# Altium PCB smartpot第三版.PcbDoc
Units mil, origin at the board's own origin, x right, y up, seen from the top; angles counter-clockwise.
Board outline 3827.48 x 2540.24 mil, 2 copper layers (Top Layer, Bottom Layer); 84 components, 74 nets, 277 pads, 61 vias.
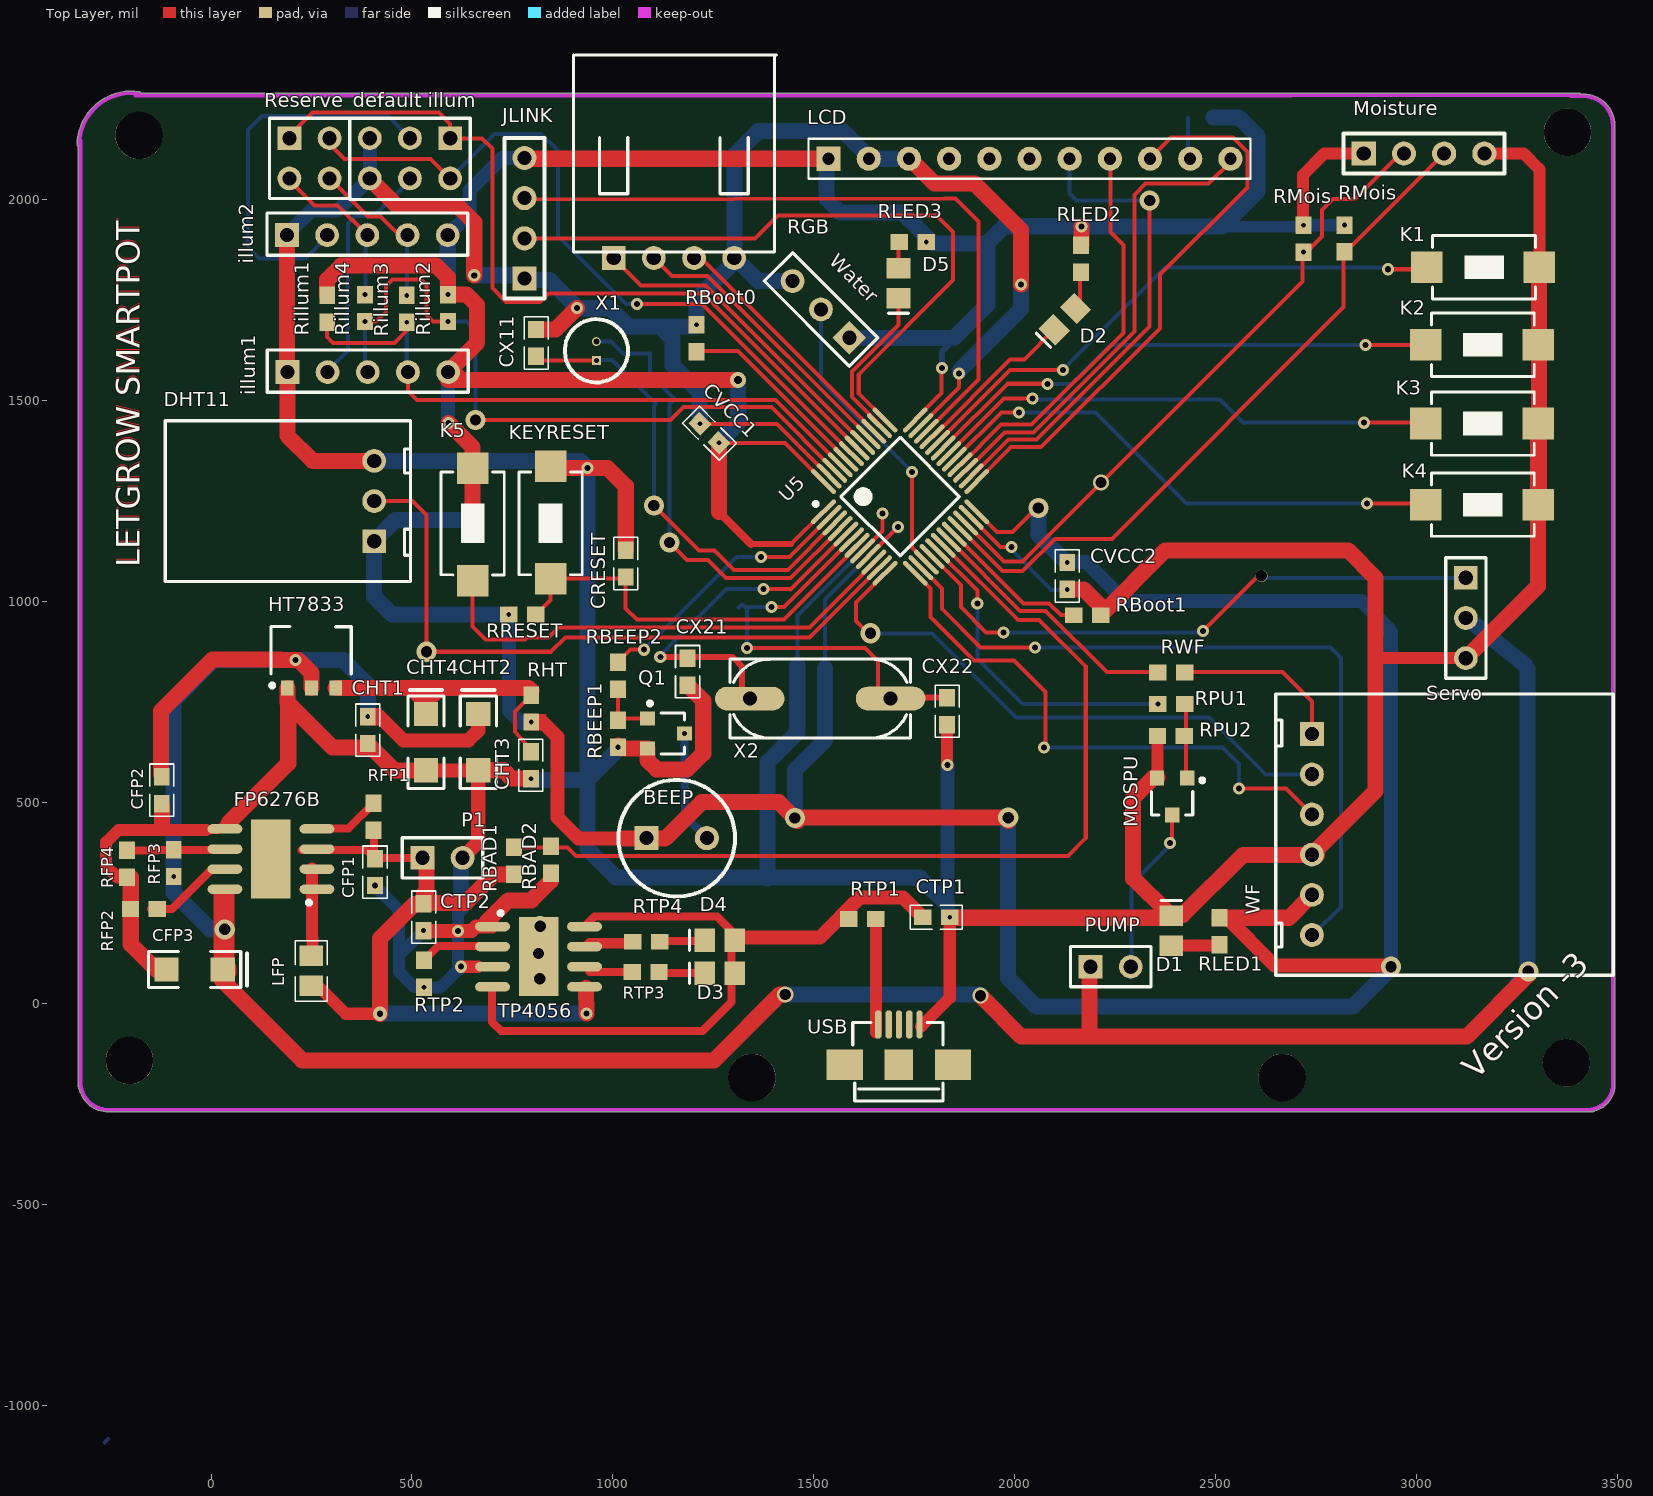
[diagram p0: Top Layer view]
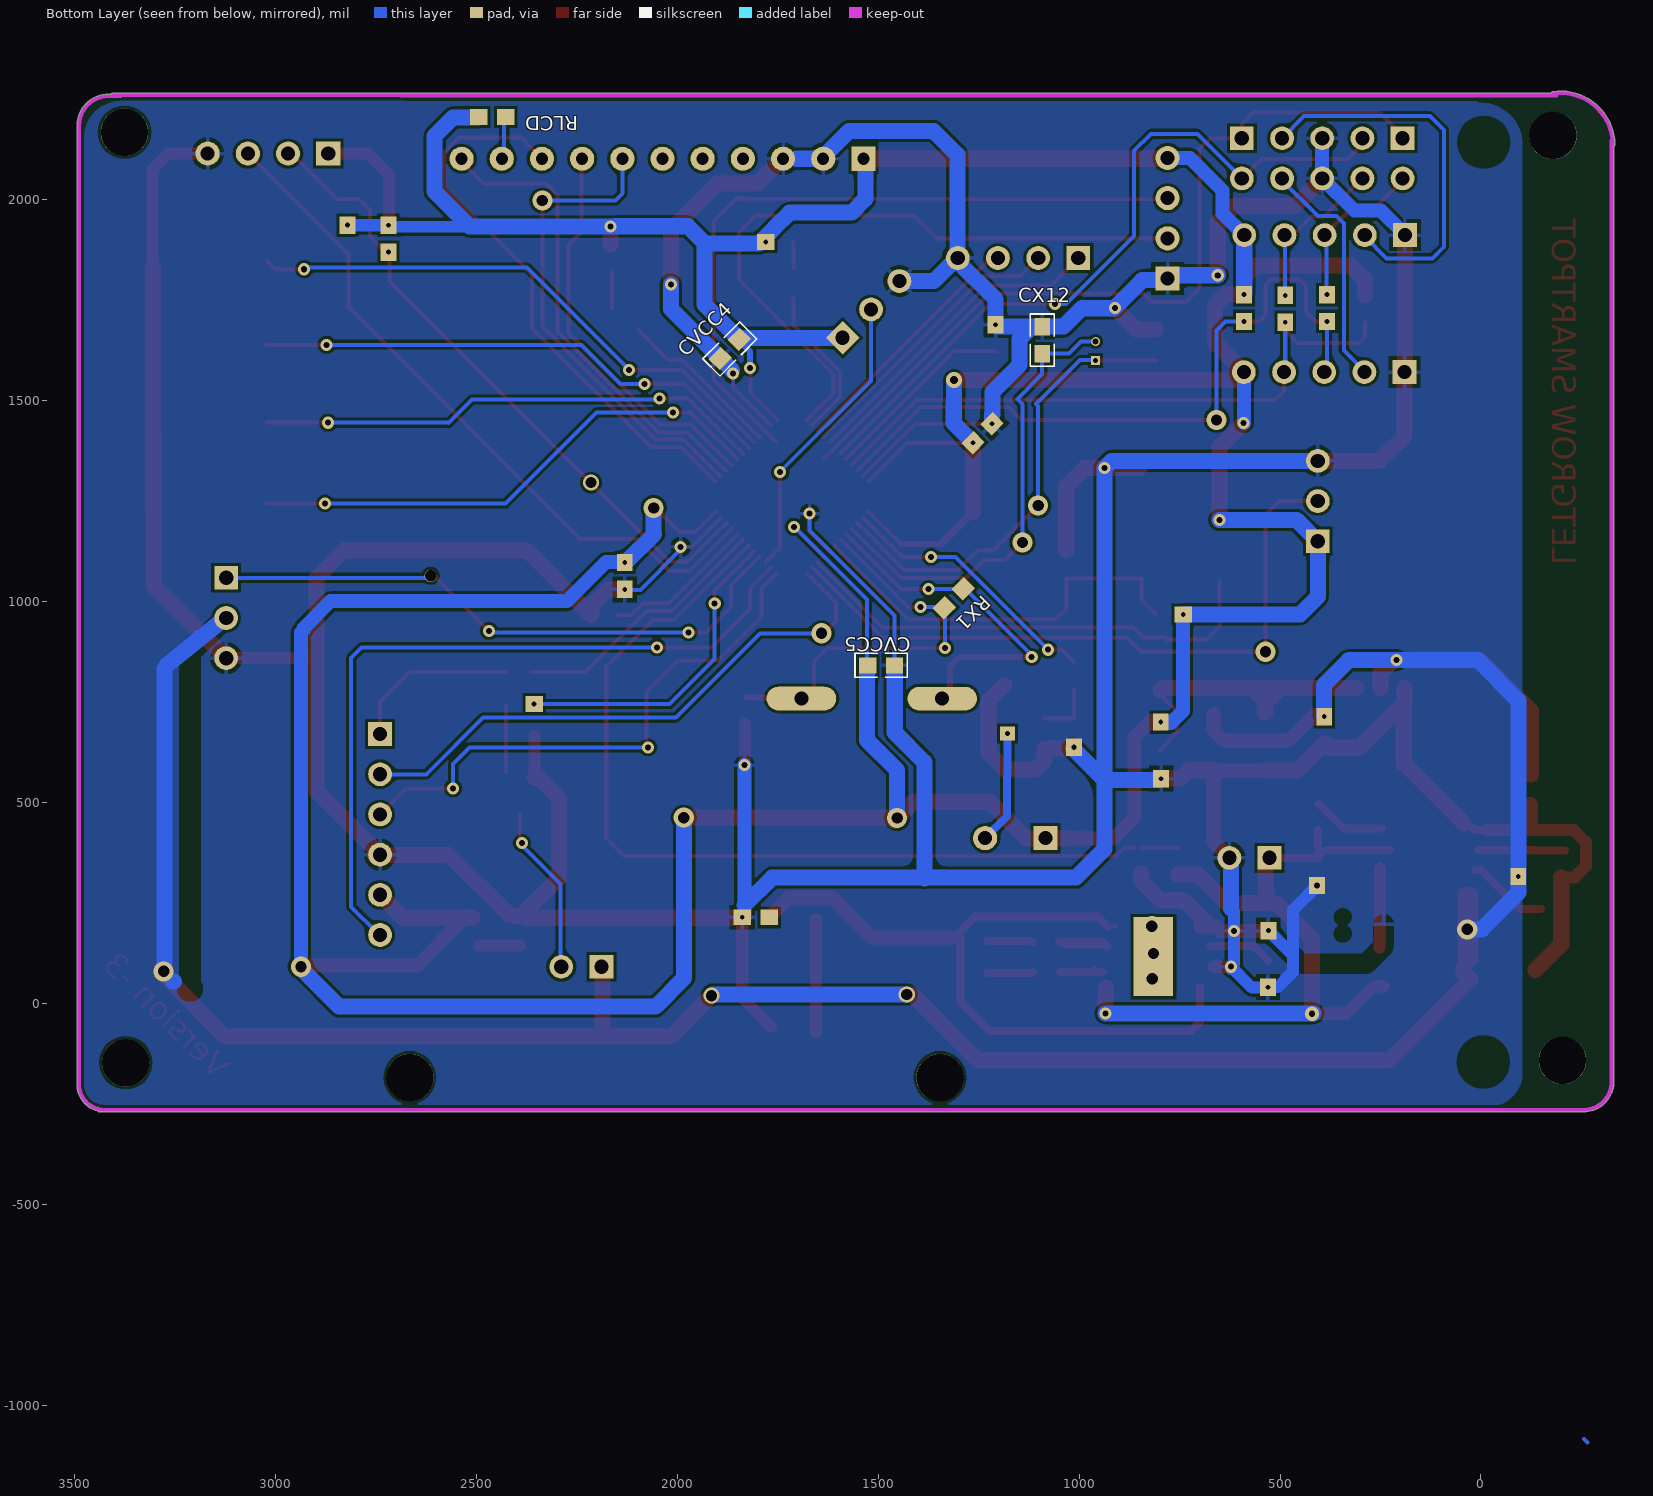
[diagram p1: Bottom Layer view, seen from below]

## Layer stack, top to bottom
Top Solder: solder mask 0.4, Solder Resist, Dk 3.5
Top Layer: signal copper 1.4
Dielectric 1: dielectric 12.6, FR-4, Dk 4.8
Bottom Layer: signal copper 1.4
Bottom Solder: solder mask 0.4, Solder Resist, Dk 3.5

## Board outline
-330.63,-191.74 -330.63,2133.71 cw(c-328.45,2138.23) -333.47,2138.33 cw(c-198.6,2135.46) -179.28,2268.96 cw(c-180,2264) -175.09,2265.01 2682.56,2265.01 cw(c2684.61,2260.44) 2684.61,2265.45 3404.61,2265.45 cw(c3404.61,2260.44) 3408.89,2263.04 3417.69,2262.83 cw(c3417.57,2257.82) 3417.69,2262.83 cw(c3415.82,2184.65) 3494.01,2185.79 cw(c3489,2185.72) 3494.02,2185.72 cw(c3489,2185.72) 3493.99,2185.18 cw(c3489,2184.65) 3494.02,2184.65 3494.02,-206 cw(c3489,-206) 3494,-206.34 cw(c3425.79,-201.65) 3443.17,-267.78 cw(c3439,-265) 3439,-270.01 -261,-270.01 cw(c-261,-265) -261.43,-270 cw(c-254.96,-194.55)

## Design rules (kind name [scope] priority, off if disabled: settings)
Clearance Clearance_1 [All] p1: gap=7
PolygonConnect [All] p1: connectstyle=Relief reliefconductorwidth=10 reliefentries=4 polygonreliefangle="90 Angle" airgapwidth=10
RoutingVias [All] p1: holewidth=15 width=30 viastyle="Through Hole" minholewidth=10 minwidth=20 maxholewidth=50 maxwidth=70
SolderMaskExpansion [All] p1: expansion=4
UnConnectedPin [All] p1:
UnpouredPolygon [All] p1: allowunpoured=TRUE
Width [All] p1: maxlimit=50 minlimit=10 preferedwidth=10
29 further rules are at their usual default settings.

## Components (designator, comment, footprint, x,y, rotation, side; value= is the part's Value field where it differs from the comment)
BEEP "BEEP" BEEP 1159,411 r0 top
CFP1 "22uF" 0603-1#1 408,326.54 r90 top
CFP2 "22uF" 0603-1#2 -123,530.54 r90 top
CFP3 "100uF" "1206 - J" -41,84 r180 top
CHT1 "0.1uf" 0603-1#3 390,680 r90 top
CHT2 "10uf /25V" "1206 - J" 665,650 r270 top
CHT3 "CAP" 0603-1#4 796,592.53 r90 top
CHT4 "CAP Pol" "1206 - J" 535,650 r270 top
CRESET "104" 0603-1#2 1032,1094.46 r90 top
CTP1 "10uF" 0603-1#5 1805,214 r180 top
CTP2 "10uF" 0603-1#4 529,214.46 r90 top
CVCC1 "104" 0603-1#6 1240.34,1418.66 r315 top
CVCC2 "104" 0603-1#6 2131,1063.54 r90 top
CVCC4 "104" 0603-1#2 1869.34,1628.66 r135 bottom
CVCC5 "104" 0603-1#2 1492.93,841 r0 bottom
CX11 "12p" 0603-1#2 809,1643.46 r270 top
CX12 "12p" 0603-1#2 1092,1650.54 r270 bottom
CX21 "22p" 0603-1#2 1186,825.46 r90 top
CX22 "22p" 0603-1#2 1832,727 r90 top
D1 "LED" LED-0805 2390,181 r90 top
D2 "LED" LED-0805 2124.95,1702.95 r225 top
D3 "LED" LED-0805 1265.6,75 r180 top
D4 "LED" LED-0805 1265.6,157 r180 top
D5 "LED" LED-0805 1711,1792.4 r270 top
"default illum" "Header 3x2" "HDR3X2 A" 595,2153 r180 top
DHT11 "Header 3" HDR3X1_DHT 406,1150 r90 top
FP6276B "" NSO8_TP4056#1 149,359 r180 top
HT7833 "HT7833" SOT-89-3 190,785 r0 top
illum1 "Header5" "HDR5x1 A1" 190,1571 r0 top
illum2 "Header5" "HDR5x1 A1" 189,1912 r0 top
JLINK "Header 4" "header 4" 780,1804 r90 top
K1 "SWITCH" SWITCH-1 3306,1832 r270 top
K2 "SWITCH" SWITCH-1 3303,1639 r270 top
K3 "SWITCH" SWITCH-1 3303,1443 r270 top
K4 "SWITCH" SWITCH-1 3303,1241 r270 top
K5 "SWITCH" SWITCH-1 651,1332 r0 top
KEYRESET "SWITCH" SWITCH-1 845,1057 r180 top
LCD "Header11" HDR11X1_A 1537,2102 r0 top
LFP "3.3uH" 0805-1 209,5.6 r90 top
Moisture "Header 4" "header 4" 2869,2115 r0 top
MOSPU "MOS-N" SOT-23#1 2392,515 r180 top
P1 "BATT" HDR2X1_A 526,362 r0 top
PUMP "Header 2" HDR2X1_A 2189,91 r0 top
Q1 "三极管" SOT-23#2 1132.26,671.4 r270 top
RBAD1 "Res1" 0603#1 754,354.54 r90 top
RBAD2 "Res1" 0603#1 846,357.46 r90 top
RBEEP1 "10K" 0603#2 1013,671 r90 top
RBEEP2 "1K" 0603#1 1013,815.46 r270 top
RBoot0 "Res1" 0603#3 1208,1655.46 r270 top
RBoot1 "Res1" 0603#1 2180.54,966 r0 top
Reserve "Header 2X2B" HDR2X2_B 195,2153 r0 top
RFP1 "10K" 0603#1 404,464 r90 top
RFP2 "43K" 0603#1 -167,235 r180 top
RFP3 "73K" 0603#4 -93,349 r270 top
RFP4 "10K" 0603#1 -209,347 r90 top
RGB "Header 4" HDR4X1_B2 1002,1855 r0 top
RHT "0R" 0603#4 797,733.53 r270 top
Rillum1 "1k" 0603#1 289,1728.47 r90 top
Rillum2 "1K" 0603#5 590,1730.47 r90 top
Rillum3 "0R" 0603#5 487,1728.47 r270 top
Rillum4 "0R" 0603#5 383,1730.47 r270 top
RLCD "Res1" 0603#1 2461,2206 r180 bottom
RLED1 "1K" 0603#1 2510,179.47 r270 top
RLED2 "1K" 0603#1 2165,1853 r270 top
RLED3 "Res1" 0603#3 1746.47,1895 r180 top
RMois "1K" 0603#5 2719,1903 r270 top
RMois "1k" 0603#6 2821,1903.54 r90 top
RPU1 "Res1" 0603#3 2390,745 r0 top
RPU2 "Res1" 0603#1 2389,665 r0 top
RRESET "10K、" 0603#4 774.46,968 r180 top
RTP1 "0.4R" 0603#1 1621,210 r0 top
RTP2 "variable" 0603#4 530,73.54 r270 top
RTP3 "2k" 0603#1 1081.46,78 r180 top
RTP4 "2k" 0603#1 1083,153 r180 top
RWF "1K" 0603#1 2390,823 r180 top
RX1 "1M" 0603#1 1312,1008 r315 bottom
Servo "Header 3" HDR3X1_A 3123,1059 r270 top
TP4056 "TP4056" NSO8_TP4056#2 815,116 r0 top
U5 "STM32F103C8T6" LQFP-48 1715,1261 r45 top
USB "USB_M" USB_MICRO 1712,-153 r0 top
Water "Header 3" HDR3X1_A 1588.71,1656.29 r135 top
WF "WF" HDR6X1_WF 2740,670 r270 top
X1 "32K" "XTAL - Y" 959,1609 r90 top
X2 "8M" XTAL 1516,755 r0 top

## Footprints (in the part's own frame and the unit in brackets; to place one, negate y for a bottom-side part, rotate by r counter-clockwise, add the part's x,y. Pads: shape width x height; smd on the part's side, far side on the other; paste and mask are expansions set on the pad)
0603#1 [mm] "无丝印"
  rect 1.1x1 smd: 1(-0.85,0) 2(0.85,0)
0603#2 [mm] "无丝印"
  rect 1.1x1 hole 0.33: 1(-0.85,0)
  rect 1.1x1 smd: 2(0.85,0)
0603#3 [mm] "无丝印"
  rect 1.1x1 hole 0.305: 1(-0.85,0)
  rect 1.1x1 smd: 2(0.85,0)
0603#4 [mm] "无丝印"
  rect 1.1x1 smd: 1(-0.85,0)
  rect 1.1x1 hole 0.305: 2(0.85,0)
0603#5 [mm] "无丝印"
  rect 1.1x1 hole 0.305: 1(-0.85,0) 2(0.85,0)
0603#6 [mm] "无丝印"
  rect 1.1x1 smd: 1(-0.85,0)
  rect 1.1x1 hole 0.33: 2(0.85,0)
0603-1#1 [mm] "˿ӡ"
  rect 1.1x1 hole 0.381: 1(-0.85,0)
  rect 1.1x1 smd: 2(0.85,0)
  silkscreen extent -1.65,-0.76 1.65,0.76, body extent -1.14,-0.38 1.14,0.38, height 1
0603-1#2 [mm] "˿ӡ"
  rect 1.1x1 smd: 1(-0.85,0) 2(0.85,0)
  silkscreen extent -1.65,-0.76 1.65,0.76, body extent -1.14,-0.38 1.14,0.38, height 1
0603-1#3 [mm] "˿ӡ"
  rect 1.1x1 smd: 1(-0.85,0)
  rect 1.1x1 hole 0.305: 2(0.85,0)
  silkscreen extent -1.65,-0.76 1.65,0.76, body extent -1.14,-0.38 1.14,0.38, height 1
0603-1#4 [mm] "˿ӡ"
  rect 1.1x1 hole 0.305: 1(-0.85,0)
  rect 1.1x1 smd: 2(0.85,0)
  silkscreen extent -1.65,-0.76 1.65,0.76, body extent -1.14,-0.38 1.14,0.38, height 1
0603-1#5 [mm] "˿ӡ"
  rect 1.1x1 hole 0.305: 1(-0.85,0)
  rect 1.1x1 all layers, no hole: 2(0.85,0)
  silkscreen extent -1.65,-0.76 1.65,0.76, body extent -1.14,-0.38 1.14,0.38, height 1
0603-1#6 [mm] "˿ӡ"
  rect 1.1x1 hole 0.305: 1(-0.85,0) 2(0.85,0)
  silkscreen extent -1.65,-0.76 1.65,0.76, body extent -1.14,-0.38 1.14,0.38, height 1
0805-1 [mm] "˿ӡ"
  rect 1.3x1.5 smd: 1(0.955,-1.016) 2(2.855,-1.016)
  silkscreen extent 0,-2.03 3.81,0, body extent 0.76,-1.52 3.05,-0.51, height 1
"1206 - J" [mil] "贴片元件"
  rect 60x60 smd: 1(-70,0) 2(70,0)
  silkscreen extent -130,-45 115,45, body extent -75,-35 75,35, height 39
BEEP [mil]
  rect 60x60 hole 35: 1(-75,0)
  round 60 hole 35: 2(75,0)
  silkscreen extent -145,-145 145,145
HDR2X1_A [mm] "Connector; Header; 2 Position"
  rect 1.5x1.5 hole 0.9: 1(0,0)
  round 1.5 hole 0.9: 2(2.54,0)
  silkscreen extent -1.27,-1.27 3.81,1.27
HDR2X2_B [mm] "Connector; Header; 2 Position"
  rect 1.5x1.5 hole 0.9: 1(0,0)
  round 1.5 hole 0.9: 2(2.54,0) 3(0,-2.54) 4(2.54,-2.54)
  silkscreen extent -1.27,-3.81 3.81,1.27
HDR3X1_A [mm] "Connector; Header; 3 Position"
  rect 1.5x1.5 hole 0.9: 1(0,0)
  round 1.5 hole 0.9: 2(2.54,0) 3(5.08,0)
  silkscreen extent -1.27,-1.27 6.35,1.27
HDR3X1_DHT [mm] "Connector; Header; 3 Position"
  rect 1.5x1.5 hole 0.9: 1(0,0)
  round 1.5 hole 0.9: 2(2.54,0) 3(5.08,0)
  silkscreen extent -2.54,-2.29 7.62,13.21, body extent -2.54,1.78 7.62,7.75, height 1.5
"HDR3X2 A" [mm] "Connector; Header; 3 Position"
  rect 1.5x1.5 hole 0.9: 1(0,0)
  round 1.5 hole 0.9: 2(2.54,0) 3(5.08,0) 4(5.08,2.54) 5(2.54,2.54) 6(0,2.54)
  silkscreen extent -1.27,-1.27 6.35,3.86
HDR4X1_B2 [mm] "Connector; Header; 4 Position"
  rect 1.5x1.5 hole 0.9: 1(0,0)
  round 1.5 hole 0.9: 2(2.54,0) 3(5.08,0) 4(7.62,0)
  silkscreen extent -2.54,0.38 10.29,12.83, body extent -2.54,2.67 10.16,9.91, height 1.5
"HDR5x1 A1" [mm] "Connector; Header; 5"
  rect 1.5x1.5 hole 0.9: 1(0,0)
  round 1.5 hole 0.9: 2(2.54,0) 3(5.08,0) 4(7.62,0) 5(10.16,0)
  silkscreen extent -1.27,-1.27 11.43,1.4
HDR6X1_WF [mm] "Connector; Header; 4 Position"
  rect 1.5x1.5 hole 0.9: 1(0,0)
  round 1.5 hole 0.9: 2(2.54,0) 3(5.08,0) 4(7.62,0) 5(10.16,0) 6(12.7,0)
  silkscreen extent -2.54,-2.29 15.24,19.05, body extent -2.6,2.92 15.05,8.64, height 1.5
HDR11X1_A [mil] "2.54mm"
  rect 60x60 hole 30: 1(0,0)
  round 60 hole 30: 2(100,0) 3(200,0) 4(300,0) 5(400,0) 6(500,0) 7(600,0) 8(700,0) 9(800,0) 10(900,0) 11(1000,0)
  silkscreen extent -50,-50 1050,50
"header 4" [mil]
  rect 60x60 hole 35: 1(0,0)
  round 60 hole 35: 2(100,0) 3(200,0) 4(300,0)
  silkscreen extent -50,-50 350,50
LED-0805 [mm]
  rect 1.3x1.5 smd: 1(-0.95,0) 2(0.95,0)
  silkscreen extent 1.91,-0.63 1.91,0.64
LQFP-48 [mm]
  oval 2.1x0.3 smd: 1(-4.1,2.75) 2(-4.1,2.25) 3(-4.1,1.75) 4(-4.1,1.25) 5(-4.1,0.75) 6(-4.1,0.25) 7(-4.1,-0.25) 8(-4.1,-0.75) 9(-4.1,-1.25) 10(-4.1,-1.75) 11(-4.1,-2.25) 12(-4.1,-2.75) 25(4.1,-2.75) 26(4.1,-2.25) 27(4.1,-1.75) 28(4.1,-1.25) 29(4.1,-0.75) 30(4.1,-0.25) 31(4.1,0.25) 32(4.1,0.75) 33(4.1,1.25) 34(4.1,1.75) 35(4.1,2.25) 36(4.1,2.75)
  oval 0.3x2.1 smd: 13(-2.75,-4.1) 14(-2.25,-4.1) 15(-1.75,-4.1) 16(-1.25,-4.1) 17(-0.75,-4.1) 18(-0.25,-4.1) 19(0.25,-4.1) 20(0.75,-4.1) 21(1.25,-4.1) 22(1.75,-4.1) 23(2.25,-4.1) 24(2.75,-4.1) 37(2.75,4.1) 38(2.25,4.1) 39(1.75,4.1) 40(1.25,4.1) 41(0.75,4.1) 42(0.25,4.1) 43(-0.25,4.1) 44(-0.75,4.1) 45(-1.25,4.1) 46(-1.75,4.1) 47(-2.25,4.1) 48(-2.75,4.1)
  silkscreen extent -4.22,-2.65 2.65,3.57, body extent -3.5,-3.5 3.5,3.5, height 1.6
NSO8_TP4056#1 [mm] "SOIC-max660"
  oval 2.2x0.6 smd: 1(-2.908,1.905) 2(-2.908,0.635) 3(-2.908,-0.635) 4(-2.908,-1.905) 5(2.908,-1.905) 6(2.908,-0.635) 7(2.908,0.635) 8(2.908,1.905)
  rect 2.5x5 smd: 9(0,0)
  silkscreen extent -2.53,2.63 -2.28,2.88
NSO8_TP4056#2 [mm] "SOIC-max660"
  oval 2.2x0.6 smd: 1(-2.908,1.905) 2(-2.908,0.635) 3(-2.908,-0.635) 4(-2.908,-1.905) 5(2.908,-1.905) 6(2.908,-0.635) 7(2.908,0.635) 8(2.908,1.905)
  rect 2.5x5 all layers, no hole: 9(0,0)
  silkscreen extent -2.52,2.63 -2.27,2.88
SOT-23#1 [mm]
  rect 0.9x0.95 smd: 1(-0.95,-1.175) 2(0.95,-1.175) 3(0,1.175)
  silkscreen extent -2.03,-1.14 1.3,1.18
SOT-23#2 [mm]
  rect 0.9x0.95 smd: 1(-0.95,-1.175) 2(0.95,-1.175)
  rect 0.9x0.95 hole 0.305: 3(0,1.175)
  silkscreen extent -2.03,-1.14 1.3,1.18
SOT-89-3 [mm]
  rect 0.8x0.95 smd: 1(0,0) 2(1.524,0) 3(3.048,0)
  silkscreen extent -1.09,0.03 4.04,3.89
SWITCH-1 [mm]
  rect 2x2 smd: 1(0,0) 2(0,-7.112)
  silkscreen extent -2,-6.75 2,-0.25
USB_MICRO [mm] "USB方孔"
  oct 0.4x1.778 smd: 1(-1.3,2.54) 2(-0.65,2.54) 3(0,2.54) 4(0.65,2.54) 5(1.3,2.54)
  rect 2.286x1.9 smd: 6(3.429,0) 7(-3.429,0)
  rect 1.8x1.9 smd: 8(0,0)
  silkscreen extent -2.92,-2.29 2.79,2.67
XTAL [mm]
  oval 4.4x1.5 hole 0.889: 1(-4.45,0.082) 2(4.45,0.091)
  silkscreen extent -5.7,-2.41 5.72,2.59
"XTAL - Y" [mil]
  rect 22x22 hole 12: 1(-9,0)
  round 22 hole 15: 2(38,0)
  silkscreen extent -64,-79 94,79

## Part data
CFP1 CFP2 CHT1 CRESET CTP1 CTP2 CVCC1 CVCC2 CVCC4 CVCC5 CX11 CX12 CX21 CX22: library part CAP, "无极性电容"
CFP3 CHT2: library part "CAP Pol", "极性电容"
CHT3: "无极性电容"
CHT4: "极性电容"
DHT11 PUMP Reserve Servo Water: "接插件"
FP6276B: library part FP627
JLINK Moisture: "header,4pin"
LFP: library part Inductance, "电感"
P1: library part "Header 2", "接插件"
Q1: library part BCP68, "NPN三极管"
RBAD1 RBAD2 RBoot0 RBoot1 RLCD RLED3 RPU1 RPU2: "电阻"
RBEEP1 RBEEP2 RFP1 RFP2 RFP3 RFP4 RHT Rillum1 Rillum2 Rillum3 Rillum4 RLED1 RLED2 RMois RMois RRESET RTP1 RTP2 RTP3 RTP4 RWF RX1: library part Res1, "电阻"
RGB: library part "Header 4_1", "接插件"
USB: "MicroUSB接口"
WF: library part "Header 6", "接插件"
X1 X2: library part XTAL

## Free pads (board coordinates)
  round 118.11 hole 118.11: 0(-203,-142) 0(-179,2160) 0(3373,-148) 0(3376,2168)
  round 118 hole 118: 2(1346,-185) 3(2666,-185)

## Via types
v1: diameter 30, hole 15, Top Layer to Bottom Layer, 40 vias
v2: diameter 50, hole 28, Top Layer to Bottom Layer, 15 vias
v3: diameter 40, hole 28, Top Layer to Bottom Layer, 3 vias
v4: diameter 35, hole 15, Top Layer to Bottom Layer, 1 vias
v5: diameter 30, hole 28, Top Layer to Bottom Layer, 1 vias
v6: diameter 40, hole 20, Top Layer to Bottom Layer, 1 vias

## Nets (pads, with @x,y where several pads share a name; then routed paths per layer and width w, separated by ;. In a path a pad name is that pad's centre, name@x,y a point inside that pad or via, vN(x,y) a via of type N, cw(c..) or ccw(c..) an arc to the next point about the centre after c; other vN are vias at no path point)
BATAD: RBAD1.2 RBAD2.2 U5.18 | length 2338.9
  Top Layer w10: RBAD1.2 RBAD2.2@843.07,388 ; RBAD2.2@861,388 887,388 908,367 2133,367 2177,411 2177,838 2061,954 2009,954 1823.1,1139.9 U5.18
BEEP: RBEEP2.1 U5.2 | length 674.6
  Top Layer w10: RBEEP2.1 1044.07,880 v1(1077,880) ; v1(1369,1111) 1439.73,1111 U5.2
  Bottom Layer w10: v1(1077,880) 1308,1111 v1(1369,1111)
DHTAD: DHT11.2 U5.11 | length 1698.7
  Top Layer w10: DHT11.2 501,1250 536,1215 v2(536,875) 846,875 882,911 1490,911 1663.22,1084.22 U5.11
GND: "default illum.3" "default illum.4" CFP1.1 CFP2.1 CFP3.2 CHT1.1 CHT2.2 CHT3.1 CHT4.2 CRESET.2 CTP1.1 CTP2.1 CVCC1.1 CVCC2.1 CVCC4.1 CVCC5.1 CX11.1 CX12.1 CX21.1 CX22.1 D1.2 DHT11.3 FP6276B.5 HT7833.1 illum1.1 illum2.1 JLINK.1 K1.1 K2.1 K3.1 K4.1 KEYRESET.2 LCD.2 LCD.3 Moisture.4 MOSPU.2 P1.2 Q1.2 RBAD2.1 RBEEP1.1 RBoot0.1 RBoot1.2 RFP2.2 RFP4.1 RGB.4 RPU2.1 RTP2.2 Servo.3 TP4056.1 TP4056.3 U5.8 U5.23 U5.35 U5.47 USB.5 Water.3 WF.4 | length 19227.6
  Top Layer w10: CHT1.1@389.54,647 CHT1.1 ; 395,2153 395,2159 ; 448,594 462,580 CHT4.2 539,580 CHT2.2 ; CVCC1.1 1408.67,1442.33 1538.22,1312.78 U5.47 ; U5.8 1620.98,1125.98 1671,1176 v1(1671,1219) ; U5.35 1766.5,1438.5 1861,1533 v1(1861,1567) ; U5.23 1891.78,1209.22 1965,1136 v1(1992,1136)
  Top Layer w20: FP6276B.5@-4.49,431 17,431 34,448
  Top Layer w30: RFP4.1@-200,313 -233,313 -261,341 -261,400.92 -230.92,431 -12,431 ; v1(622,91) 664,91 TP4056.3@665,92 ; USB.5@1767.59,-57.41 1838.47,13.47 CTP1.1 ; v1@1832,595 CX22.1 CX22.1@1832,695 ; MOSPU.2@2355.54,562.2 RPU2.1 ; 2902,859 Servo.3 ; Moisture.4 3267,2115 3306,2076 K1.1
  Top Layer w35: CTP2.1 530,180 v1(615,180) 648,180 659,191 TP4056.1@699.51,191 ; CHT4.2@538,579 664,579 CHT2.2 665,401 P1.2
  Top Layer w40: RFP4.1@-200,313 -200,147 CFP3.2@-136,83 ; -122,443 CFP2.1@-122,493 ; 43,448 192,597 192,747 ; illum2.1 189,1572 illum1.1 190,1413 253,1350 DHT11.3 ; HT7833.1 190,749 192,747 ; CHT1.1@385,637 302,637 192,747 ; CHT1.1 457.54,579 538,579 CHT4.2@539,580 ; 395,2053 395,2052 463,1984 615,1984 655,1944 v1(655,1812) ; CHT2.2 728,580 748.93,559.07 CHT3.1 ; TP4056.1@684,200 740,256 797,256 846,305 RBAD2.1 ; CX11.1 856.93,1676.93 v1(911,1731) ; KEYRESET.2@850,1332 v1(937,1332) 987,1332 1032,1287 CRESET.2 ; RBEEP1.1@1013,642 1021,634 Q1.2 1086,605 1109,582 1185,582 1225,622 1225,753 CX21.1 ; RGB.4@1299,1855 RGB.4 RGB.4@1303,1856 ; LCD.3@1738,2103 1801,2040 1901,2040 2016.33,1924.67 v1(2016.33,1789.33) ; CTP1.1@1845.47,213 2373.82,213 D1.2@2382.97,222.15 ; CVCC2.1 2171.93,1030.07 2214,988 RBoot1.2 2375,1127 2830,1127 2898,1059 2898,528 WF.4 ; 2295,310.13 2295,311.71 ; MOSPU.2@2355.54,562.2 2346.2,562.2 2295,511 2295,311.71 ; WF.4@2752,369 2568,369 2419,220 2390.24,216.48 2389.15,217.32 D1.2@2382.97,222.15 ; Servo.3 3303,1039 K4.1 K3.1@3303,1417 ; K4.1@3305.37,1225 K1.1@3305.37,1832 ; 2295,311.71 2382.97,223.74 D1.2@2382.97,222.15
  Bottom Layer w10: CVCC5.1@1459,841.46 1459,965 1671,1177 v1(1671,1219) ; v1@1863.5,1564.5 v1@1863.5,1573.5 ; v1(1992,1136) 1992,1129 2092,1029 2133,1029 CVCC2.1@2134,1028
  Bottom Layer w30: CFP1.1@408,292 468,232 468,120 ; CTP2.1 468,120 ; RTP2.2@530,39 570,39 v1(622,91) v1@622,86 ; RTP2.2 505.93,40.07 468,78 468,120 ; v1@616,97 615,98 v1(615,180) 615,227 622,234
  Bottom Layer w35: illum2.1@186.97,1910.62 249.35,1973 315,1973 395,2053 395,2153 ; CTP1.1@1833,214 1833,244 v1(1833,593)
  Bottom Layer w40: DHT11.3 919,1350 v1(937,1332) 937,569 924,556 ; RTP2.2@530,39 RTP2.2 ; 622,236 P1.2@622,362 ; v1(655,1812) 775,1812 JLINK.1@783,1804 ; JLINK.1 784,1800 843,1800 913,1730 993,1730 1039,1684 CX12.1 1118,1684 ; CHT3.1@798,556 924,556 ; RBEEP1.1@1015.5,634.5 937,556 ; RBoot0.1 1203.07,1684 1118,1684 ; 1208,1716 1208,1752 1303,1847 RGB.4@1303,1856 ; CVCC1.1 1216.67,1467.67 1216,1467 1216,1521 1148,1589 1148,1654 1118,1684 ; RGB.4 RGB.4@1303,1856 ; 1385,311 1385,313 ; Water.3 1361.29,1797.71 RGB.4@1303,1856 ; CVCC5.1@1459,841.46 1459,674 1385,600 1385,313 ; 1704,2102 LCD.2 1637,2107 1573,2171 1362,2171 1303,2112 RGB.4@1303,1856 ; 1833,244 1764,313 1385,313 ; v1@1863.5,1575.5 2016.33,1728.33 v1(2016.33,1789.33) ; 924,556 937,556 ; 937,556 937,384 1008,313 1385,313
ILLUMADD1: "default illum.6" Reserve.2 U5.43 | length 1855.5
  Top Layer w10: Reserve.2@280,2154 332,2102 546,2102 595,2053 ; v1(1060,1740) 1222,1740 1593.82,1368.18 U5.43
  Bottom Layer w10: 595,2053 706,2164 821,2164 863,2122 863,1910 1033,1740 v1(1060,1740)
ILLUMADD2: "default illum.1" Reserve.1 U5.42 | length 2090.6
  Top Layer w10: Reserve.1@176,2154 189,2154 252,2217 567,2217 595,2189 595,2153 ; 589,2159 595,2153 ; U5.42@1634,1357 1224,1767 840.25,1767 819.25,1746 734,1746 700,1780 700,2127 674,2153 595,2153
ILLUMSCL: illum1.4 Rillum1.1 Rillum3.2 U5.45 | length 1599
  Top Layer w10: Rillum1.1 289,1659 304,1644 457,1644 487,1674 Rillum3.2 ; illum1.4 490,1524 512,1502 1404.4,1502 U5.45
  Bottom Layer w10: Rillum3.2@487,1696 Rillum3.2 487,1574 illum1.4
ILLUMSDA: illum1.3 Rillum2.1 Rillum4.2 U5.46 | length 1775.3
  Top Layer w10: Rillum4.2 411,1697 435,1721 435,1785 451,1801 523,1801 536,1788 536,1713 552,1697 Rillum2.1 ; v2(658,1452) 1144,1452 1176,1484 1394.56,1484 U5.46
  Bottom Layer w10: Rillum4.2@383,1696 383,1578 illum1.3 ; Rillum2.1 636,1697 658,1675 v2(658,1452)
KEY1: K1.2 U5.32 | length 1409.2
  Top Layer w10: U5.32 1808.26,1396.26 1988,1576 v1(2120,1576) ; v1(2929,1827) 3001,1827 K1.2@3021,1847
  Bottom Layer w10: v1@2117.11,1576 2119,1576 2374,1831 v1@2934,1831
KEY2: K2.2 U5.31 | length 1300.7
  Top Layer w10: U5.31 1822.18,1382.18 1982,1542 v1@2075,1542 ; v1(2873,1639) K2.2
  Bottom Layer w10: v1(2082,1541) 2141,1541 2239,1639 v1(2873,1639)
KEY3: K3.2 U5.30 | length 1268.8
  Top Layer w10: U5.30 1836.18,1368.18 1973,1505 2041,1505 v1@2042,1504 ; v1(2869,1445) K3.2@3023,1445
  Bottom Layer w10: v1(2044,1505) 2044,1503 2511.04,1503 2570.04,1444 2571.04,1445 v1(2869,1445)
KEY4: K4.2 U5.29 | length 1315.4
  Top Layer w10: U5.29 1850.26,1354.26 1967,1471 v1(2011,1471) ; v1(2877,1244) K4.2@3023,1244
  Bottom Layer w10: v1(2011,1471) 2201,1471 2428,1244 v1(2877,1244)
KEY5: K5.2 U5.10 | length 1206.9
  Top Layer w10: K5.2 651,938 683,906 781,906 785,910 840,910 865,935 1488.95,935 1649.58,1095.62 U5.10
"LCD CS": LCD.11 U5.27 | length 1184.6
  Top Layer w10: U5.27 1880.37,1326.42 1974.95,1421 2047.23,1421 2298,1671.77 2298,2012.33 2325.67,2040 2483,2040 2537,2094 LCD.11
"LCD MOSI": LCD.8 U5.28 | length 990
  Top Layer w10: U5.28 1866.45,1340.34 1966.11,1440 2042.18,1440 2271,1668.82 2271,1887 2238,1920 LCD.8@2238,2102
"LCD RS": LCD.9 U5.25 | length 1422.6
  Top Layer w10: U5.25 1991.11,1384 2066,1384 2362,1680 2362,1814 2579,2031 2579,2119.4 2543.4,2155 2389,2155 LCD.9@2336.5,2102.5
"LCD SCK": LCD.7 U5.26 | length 1205.1
  Top Layer w10: U5.26 1894.29,1312.5 1984.79,1403 2055,1403 2336,1684 v2(2336,1998)
  Bottom Layer w10: LCD.7 2137,2015 2154,1998 v2(2336,1998)
LED1: D2.2 U5.33 | length 414.6
  Top Layer w10: U5.33 1796.86,1409.94 1988.92,1602 2024,1602 D2.2
LED2: D5.2 U5.38 | length 395
  Top Layer w10: U5.38 1663.22,1437.78 1664.62,1439.17 1595,1508.79 1595,1572.04 1711,1688.04 D5.2
LEDB: RGB.3 U5.39 | length 640.5
  Top Layer w10: RGB.3 1219,1855 1649.58,1424.42 U5.39
  Bottom Layer w10: RGB.3@1203,1856 RGB.3@1217,1856
LEDG: RGB.2 U5.40 | length 718.2
  Top Layer w10: RGB.2 1147,1810 1236,1810 1635.66,1410.34 U5.40
LEDR: RGB.1 U5.41 | length 810
  Top Layer w10: RGB.1 1070,1787 1231,1787 1621.74,1396.26 U5.41
MOISCLK: Moisture.3 RMois.1@2821,1870.07 U5.21 | length 1756.5
  Top Layer w10: U5.21 1969.6,1076 2020,1076 2100,1156 2242,1156 2819,1733 2819,1865 Moisture.3
MOISSDA: Moisture.2 RMois.2@2719,1869.53 U5.22 | length 1633.3
  Top Layer w10: U5.22 1973.44,1100 2019.96,1100 2092.96,1173 ; 2093,1173 2716,1796 2716,1859.14 2765,1908.14 2765,1974 2793,2002 2847,2002 Moisture.2@2971,2126
  other v3: 2215,1296
NetBEEP_2: BEEP.2 Q1.3 | length 283.2
  Bottom Layer w20: Q1.3 1179.22,465.41 BEEP.2
NetCHT3_2: CHT3.2 CHT4.1 HT7833.3 RHT.1 | length 1079.7
  Top Layer w10: 553,785 560,792 772,792 779,785 RHT.1 756,726 756,676 CHT3.2@799,629
  Top Layer w40: HT7833.3 503,785 ; 503,786 503,785 ; CHT4.1@538,723 CHT4.1@538,746 ; 565,781 538,754 ; RHT.1@797,778 790,785 779,785 553,785 ; 503,785 553,785 ; 503,785 503,781 CHT4.1@538,746 ; CHT4.1@538,746 538,754 ; 538,754 538,770 553,785
NetCTP1_2: CTP1.2 D3.1 D4.1 RTP1.1 TP4056.4 TP4056.8 | length 1832.5
  Top Layer w10: TP4056.4 TP4056.4@705,41 ; TP4056.8@908,191 TP4056.8 ; D4.1@1304,171 D4.1@1312,171
  Top Layer w20: TP4056.4@699.51,41 699.51,-46.51 722,-69 1223,-69 1295,3 D4.1@1295,162 ; TP4056.8 954.49,216 1259,216 D4.1@1304,171
  Top Layer w35: D4.1@1319,164 1515.54,164 1614.54,263 1722.54,263 CTP1.2
NetD1_1: D1.1 RLED1.2 | length 103.6
  Top Layer w30: D1.1 RLED1.2@2493.6,143.6
NetD2_1: D2.1 RLED2.2 | length 88.5
  Top Layer w10: D2.1@2163,1731 RLED2.2@2163,1819.53
NetD3_2: D3.2 RTP3.1 | length 117.5
  Top Layer w10: RTP3.1@1114.93,75 RTP3.1@1117.93,75
  Top Layer w20: RTP3.1 1117.93,75 D3.2
NetD4_2: D4.2 RTP4.1 | length 114.6
  Top Layer w10: RTP4.1@1116.46,155 RTP4.1@1118.46,155
  Top Layer w20: RTP4.1 1118.46,155 D4.2@1228.2,155
NetD5_1: D5.1 RLED3.2 | length 63.2
  Top Layer w10: D5.1 RLED3.2@1711,1893
NetFP6276B_1: FP6276B.1 FP6276B.2 LFP.2 | length 199.4
  Top Layer w30: FP6276B.2@251,336 251,161 252,162 LFP.2@252,139
NetFP6276B_4: FP6276B.4 RFP1.2 | length 183.4
  Top Layer w20: FP6276B.4@246.49,435 341.54,435 RFP1.2
NetFP6276B_6: FP6276B.6 RFP3.1 RFP4.2 | length 216.4
  Top Layer w20: RFP4.2@-209,379.93 -133,379.93 -131.93,381 FP6276B.6@7,381
NetFP6276B_7: FP6276B.7 RFP2.1 | length 202.2
  Top Layer w20: RFP2.1@-149,235 RFP2.1 -97,235 0,332 FP6276B.7@13,332
NetJLINK_2: JLINK.2 U5.37 | length 1700.3
  Top Layer w10: JLINK.2 1354,1904 1411,1961 1806,1961 1847,1920 1847,1800 1612,1565 1612,1518 1677.42,1452.58 U5.37
NetJLINK_3: JLINK.3 U5.34 | length 1762
  Top Layer w10: JLINK.3@782,2001 1825,2003 1853,2003 1910,1946 1910,1553 1757,1400 U5.34@1756,1400
NetLCD_4: LCD.4
NetLCD_5: LCD.5
NetLCD_6: LCD.6
NetLCD_10: LCD.10 RLCD.2 | length 102
  Bottom Layer w10: LCD.10@2431,2102 RLCD.2@2431,2204
NetMOSPU_1: MOSPU.1 RPU1.2 RPU2.2 | length 163.7
  Top Layer w10: MOSPU.1@2427,576 RPU1.2@2427,739.74
NetMOSPU_3: MOSPU.3 PUMP.2 | length 400.5
  Top Layer w10: v1@2392,404 MOSPU.3
  Bottom Layer w10: PUMP.2@2291,103 2291,297 2387,393 v1(2387,399)
NetQ1_1: Q1.1 RBEEP1.2 RBEEP2.2 | length 146.1
  Top Layer w10: RBEEP2.2 1013,708.93 1013.13,708.8 Q1.1
NetRBoot0_2: RBoot0.2 U5.44 | length 483.3
  Top Layer w10: RBoot0.2@1208,1623 1311,1623 1579.74,1354.26 U5.44
NetRBoot1_1: RBoot1.1 U5.20 | length 381.1
  Top Layer w10: U5.20 1850.02,1166.98 2022,995 2086,995 2115,966 RBoot1.1
NetRTP2_1: RTP2.1 TP4056.2 | length 157.2
  Top Layer w20: RTP2.1 565.5,142.5 TP4056.2@672.5,142.5
NetRTP3_2: RTP3.2 TP4056.6 | length 196
  Top Layer w10: TP4056.6@963,89 974,78 977.5,74.5 ; 978,75 RTP3.2@1048,75
  Top Layer w20: 942.49,78 974,78 RTP3.2
NetRTP4_2: RTP4.2 TP4056.7 | length 250.9
  Top Layer w10: TP4056.7 1035.54,141 1047.54,153 RTP4.2@1049.54,155
  Top Layer w20: TP4056.7 941.49,153 1047.54,153 RTP4.2
NetRWF_1: RWF.1 WF.1 | length 427.8
  Top Layer w10: RWF.1@2423.47,824 2667,824 2740,751 WF.1
NetUSB_2: USB.2
NetUSB_3: USB.3
NetUSB_4: USB.4
NRST: CRESET.1 KEYRESET.1 RRESET.1 U5.7 | length 1031.5
  Top Layer w10: RRESET.1 809,968 845,1004 KEYRESET.1 1032,1057 1032,983 1060,955 1425.44,955 1607.82,1137.39 U5.7
PB1: RWF.2 U5.19 | length 664.5
  Top Layer w10: U5.19 1836.18,1153.82 2013,977 2077.17,977 2230.17,824 RWF.2@2364,824
PUMPCTRL: RPU1.1 U5.17 | length 805.8
  Top Layer w10: U5.17 1907,1027.24 v1(1907,995)
  Bottom Layer w10: v1(1907,995) 1907,857.07 2019.07,745 RPU1.1
RESERVESCL: illum2.4 Reserve.4 Rillum3.1 | length 405.3
  Top Layer w10: Reserve.4@289,2047 302,2047 391,1958 422,1958 468,1912 illum2.4
  Bottom Layer w10: Rillum3.1@488,1763 488,1911 illum2.4
RESERVESDA: illum2.3 Reserve.3 Rillum4.1 | length 407.9
  Top Layer w10: Reserve.3@182,2047 197.25,2031.75 211.25,2031.75 257,1986 315,1986 illum2.3
  Bottom Layer w10: Rillum4.1@384,1762 illum2.3@384,1907
SERVOCTRL: Servo.1 U5.16 | length 1509.3
  Top Layer w10: U5.16 1794.94,1112.06 1866,1041 1866,986 1929,923 v1(1972,923) ; v1(2469,927) 2614,1072 v5(2614,1064)
  Bottom Layer w10: v1(1972,923) v1@2469,923 ; v5(2614,1064) 2619,1059 Servo.1
TEMPADD1: "default illum.5" illum1.2 | length 593
  Bottom Layer w10: illum1.2 290,1574 341,1625 341,1941 359,1959 406,1959 497.5,2050.5
TEMPADD2: "default illum.2" illum2.2 | length 965.7
  Bottom Layer w10: illum2.2 289,1908 235,1854 121,1854 92,1883 92,2173 127,2208 440,2208 495,2153
VCC3.3: BEEP.1 CVCC1.2 CVCC2.2 CVCC4.2 CVCC5.2 DHT11.1 illum1.5 illum2.5 JLINK.4 K5.1 LCD.1 Moisture.1 RHT.2 Rillum1.2 Rillum2.2 RLCD.1 RLED1.1 RLED2.1 RLED3.1 RMois.1@2719,1936.46 RMois.2@2821,1937 RRESET.2 U5.1 U5.9 U5.24 U5.36 U5.48 Water.1 WF.5 | length 14752
  Top Layer w10: CVCC1.2 1428,1395 1524.3,1298.7 U5.48 ; 1443.88,1143 U5.1 ; U5.9@1635.66,1109.55 U5.9 1636.06,1112.06 v1(1710,1186) ; U5.36 1752.58,1453.58 1818,1519 v1@1818,1581 ; U5.24 1905.7,1223.3 1956,1173 1995,1173 2058,1236 2059,1235 v2(2059,1233)
  Top Layer w15: 1344,1143 1443.88,1143
  Top Layer w20: 1264,1223 1344,1143
  Top Layer w30: RMois.1@2718.07,1934.47 2718,1934.54 2718,2062 2771,2115 Moisture.1
  Top Layer w35: RHT.2 824.93,700.07 862,663 862,462 914,410 1023,410 ; RLED1.1@2524,217 2528.07,212.93 2647,94 v2@2942,94
  Top Layer w40: Rillum1.2 289,1801 324,1836 560,1836 590,1806 Rillum2.2 636.07,1763.93 662,1738 662,1644 590,1572 illum1.5 ; v1(591,1444) 651,1384 K5.1 v1(651,1203) ; JLINK.4@782,2102 1504,2102 ; 1023,410 1130,410 1221,501 1413,501 v2(1453,461) 1460,454 1468,462 v2(1984,462) 1984,455 v2@1985,454 ; 1264,1223 CVCC1.2 ; v6@1307,1551 624,1551 ; RLED2.1@2166,1887.46 v1(2166,1933) ; RLED1.1 2528.07,212.93 2682.93,212.93 WF.5 ; illum1.5 590,1551 624,1551 ; illum1.5 596,1565 610,1565 624,1551
  Bottom Layer w10: CVCC5.2@1528,841 1528,1005 1709,1186 v1(1710,1186) ; v1@1818,1570 v1@1818,1573
  Bottom Layer w15: v1(1819,1581) 1819,1622 CVCC4.2@1850,1653
  Bottom Layer w30: 2462,1933 2717.24,1932 2717.39,1935.01 2717.46,1936.54 RMois.1@2717.54,1938 ; RMois.1@2719,1936.46 RMois.2@2821,1936.46
  Bottom Layer w35: illum2.5 643,1966 643,2023 724,2104 JLINK.4 ; v1@590,1444 illum1.5 ; RRESET.2@742,968 742,728 772,698 RHT.2@790,698 ; CVCC2.2@2136,1099 2137,1098 2178,1098 2275,1001 2863,1001 2931,933 2929,931 2937,923 v2(2937,91)
  Bottom Layer w40: Rillum2.2@589,1766 illum2.5 ; v1(651,1203) 459,1203 DHT11.1 406,1012 450,968 RRESET.2 ; CVCC1.2 1312.12,1444.15 v6(1311,1551) ; v2(1453,461) 1453,580 1528,655 CVCC5.2@1528,833 ; LCD.1@1532,2102 1532,2002 1566,1968 1720.52,1968 1759.65,1928.87 1759.65,1928.35 1797,1891 1932,1891 ; Water.1 CVCC4.2@1849.29,1656.29 ; CVCC4.2@1850,1657 1932,1739 1932,1891 ; v2(2059,1233) 2059,1169 2058,1168 2127,1099 CVCC2.2@2136,1099 ; v1@2155,1934 1974,1934 1932,1892 1932,1891 ; v1@2160,1933 v1(2166,1933) 2462,1933 2517,1933 2604,2020 2604,2159 2558,2205 RLCD.1@2494.46,2205 ; v2(2937,91) 2929,83 2931,81 2842,-8 2054,-8 1983,63 v2@1983,459 ; v2@1983,459 v2@1984,460 ; v2@1983,459 1983,463 v2(1984,462) ; v2@1984,460 1985,461 v2(1984,462) ; v2@1984,460 v2(1984,462)
VCC5V: CFP2.2 CFP3.1 CHT1.2 CHT2.1 FP6276B.8 HT7833.2 PUMP.1 RFP3.2 Servo.2 | length 7539.2
  Top Layer w10: CHT1.2 417.54,713.46 478,653 640,653 641,654
  Top Layer w30: CFP3.1@43,89.49 FP6276B.8@43,275
  Top Layer w35: 417.54,713.46 419.54,713.46 479,654 641,654 641,655 665,679 CHT2.1
  Top Layer w40: CFP2.2@-125,570 -125,727 4,856 174,856 ; CFP3.1@26,110 26,270 ; CFP3.1@43,89.49 43,76 26,59 227,-142 1252,-142 1416,22 v3(1429,22) ; 155,854 v1(210,854) 218,854 250,822 HT7833.2 ; v3@1922,12 2017,-83 2193,-83 ; PUMP.1@2186,88 2186,-76 2193,-83 ; v2(3278.5,79.5) 3278.5,70.48 3125.02,-83 2193,-83
  Bottom Layer w40: v2(34,184) -2,184 -93.5,275.5 -93.5,753.5 7,854 v1(210,854) 329,854 391,792 CHT1.2@391,715 ; v3(1429,22) 1912,22 v3(1915,19) ; Servo.2@3122,962 3124.07,960.32 3271,841 ; 3253,54 3255,54 ; v2@3277,81 3277,832
VCCBAT: CFP1.2 CTP2.2 FP6276B.3 LFP.1 P1.1 RBAD1.1 RFP1.1 TP4056.5 | length 1862.2
  Top Layer w20: FP6276B.3@224.49,381 387,381 CFP1.2@406,362 ; RFP1.1@406,433 CFP1.2@406,362 ; CFP1.2 CFP1.2@406,362 ; P1.1 CFP1.2@406,362
  Top Layer w30: LFP.1@241,42.2 266.8,42.2 335,-26 v4(420,-26) ; 506,247 528.07,247 CTP2.2
  Top Layer w40: v4(420,-26) 420,161 506,247 ; P1.1 525,363 536,363 536,278.93 530,272.93 ; CTP2.2 531,249.93 633.93,249.93 705,321 RBAD1.1@754,321 ; TP4056.5@933,37.49 v1(934,-25)
  Bottom Layer w40: v4@417,-25 v1(934,-25)
VCCUSB: RTP1.2 USB.1 | length 283
  Top Layer w30: USB.1@1654.46,-73 RTP1.2
WATERAD: U5.15 Water.2 | length 738.1
  Top Layer w10: v1(1744,1322) 1744,1135 1780.42,1098.58 U5.15@1780.42,1097.58
  Bottom Layer w10: Water.2 1518,1549 1744,1323 v1(1744,1322)
WFEN: U5.14 WF.6 | length 1891.3
  Top Layer w10: U5.14 1766.78,1084.22 1819,1032 1819,982 1915,886 v1(2051,886)
  Bottom Layer w10: v1(2051,886) 2786,886 2812,860 2812,240 2746.5,174.5 WF.6@2735.5,174.5
WFRXD: U5.12 WF.2 | length 1451.2
  Top Layer w10: v2(1641,921) 1641,916 1605,952 1605,998 1677.3,1070.3 U5.12
  Bottom Layer w10: v2(1641,921) 1794,921 2004,711 2484,711 2625,570 2734,570 WF.2@2740,576
WFTXD: U5.13 WF.3 | length 1388.2
  Top Layer w10: U5.13 1752.7,1070.3 1791,1032 1791,961 1899,853 1999,853 2077,775 v1@2077,647 ; v1(2558,535) 2675,535 WF.3
  Bottom Layer w10: v1(2073,637) 2517,637 2558,596 v1(2558,535)
XTA8M-1: CX11.2 U5.3 X1.1 | length 1162.9
  Top Layer w10: CX11.2@809,1600 X1.1 ; v2(1102,1239) 1214,1127 1253,1127 1301,1079 1435.57,1079 U5.3
  Bottom Layer w10: X1.1@959,1601 998,1601 1107,1492 1102,1487 v2(1102,1239)
XTA8M-2: CX12.2 U5.4 X1.2 | length 1159.7
  Top Layer w10: v2(1141,1147) 1185,1103 1237,1103 1282,1058 1442.4,1058 U5.4
  Bottom Layer w10: X1.2 995,1647 1024.93,1617.07 CX12.2 1092,1566 1154,1504 1141,1491 v2(1141,1147)
XTA32K-1: CX21.2 RX1.1 U5.5 X2.1 | length 900.6
  Top Layer w10: v1(1375,1031) 1441,1031 1442,1030 1579.74,1167.74 U5.5
  Top Layer w15: v1(1118,862) 1298,862 1322,838 1322,749 X2.1@1323,748
  Bottom Layer w10: v1(1118,862) 1118,866.65 RX1.1@1282.35,1031 ; RX1.1@1283.01,1031.66 RX1.1@1282.35,1031 ; v1@1377.67,1030 1376.67,1031 v1(1375,1031) RX1.1@1282.35,1031
XTA32K-2: CX22.2 RX1.2 U5.6 X2.2 | length 985.3
  Top Layer w10: v1(1334,884) 1628,884 1660,852 X2.2@1660,758 ; v1(1395,986) 1426,986 1593.82,1153.82 U5.6
  Top Layer w15: X2.2@1735,760.93 CX22.2@1829,760.93
  Bottom Layer w10: RX1.2@1313,984 1322,993 1329,986 v1(1395,986) ; v1(1334,884) 1334,982.67 RX1.2
pads on no net: FP6276B.9 TP4056.9 USB.6 USB.7 USB.8
copper on no net: | length 12.7
  Bottom Layer w10: -265,-1093 -256,-1084
  other v2: 818,61 815,124 819,192

## Polygon pours and split planes (outlines as drawn)
GND on Bottom Layer "Bottom Layer-GND" (solid, pour order 0): -117,2261 -114,2264 3501,2264 3501,-271 -124,-271

## Keep-outs
Keep-Out Layer:
  lines w10: -328.45,2138.23 cw(c-198.6,2135.46) -180,2264 ; -325.62,2148 -325.62,-191.83 ccw(c-254.96,-194.55) -261,-265 3439,-265 ; -188,2260 2687.58,2260 ; 2684.61,2260.44 3404.61,2260.44 ; 3386.39,2258.56 3417.57,2257.82 cw(c3415.82,2184.65) 3489,2185.72 ; 3426.9,-265 ccw(c3425.79,-201.65) 3489,-206 3489,2184.65

## Other copper
Top Layer:
  rectangle net VCC3.3: 795,679 833,690
  rectangle net VCC3.3: 794,713 833,720
  rectangle net VCC5V: 384,692 432,705
  rectangle net VCC5V: 390,724 424,735
  text "LETGROW SMARTPOT" at -158,1090 h100 r90
  text "Version -3" at 3162,-206 h100 r45

## Silkscreen, mask and mechanical layers (free items; w line width, h text height)
Top Overlay:
  text "LETGROW SMARTPOT" at -158,1085 h100 r90
  text "Version -3" at 3162,-206 h100 r45